# Allegro board MK60_MODULE_V10A.brd
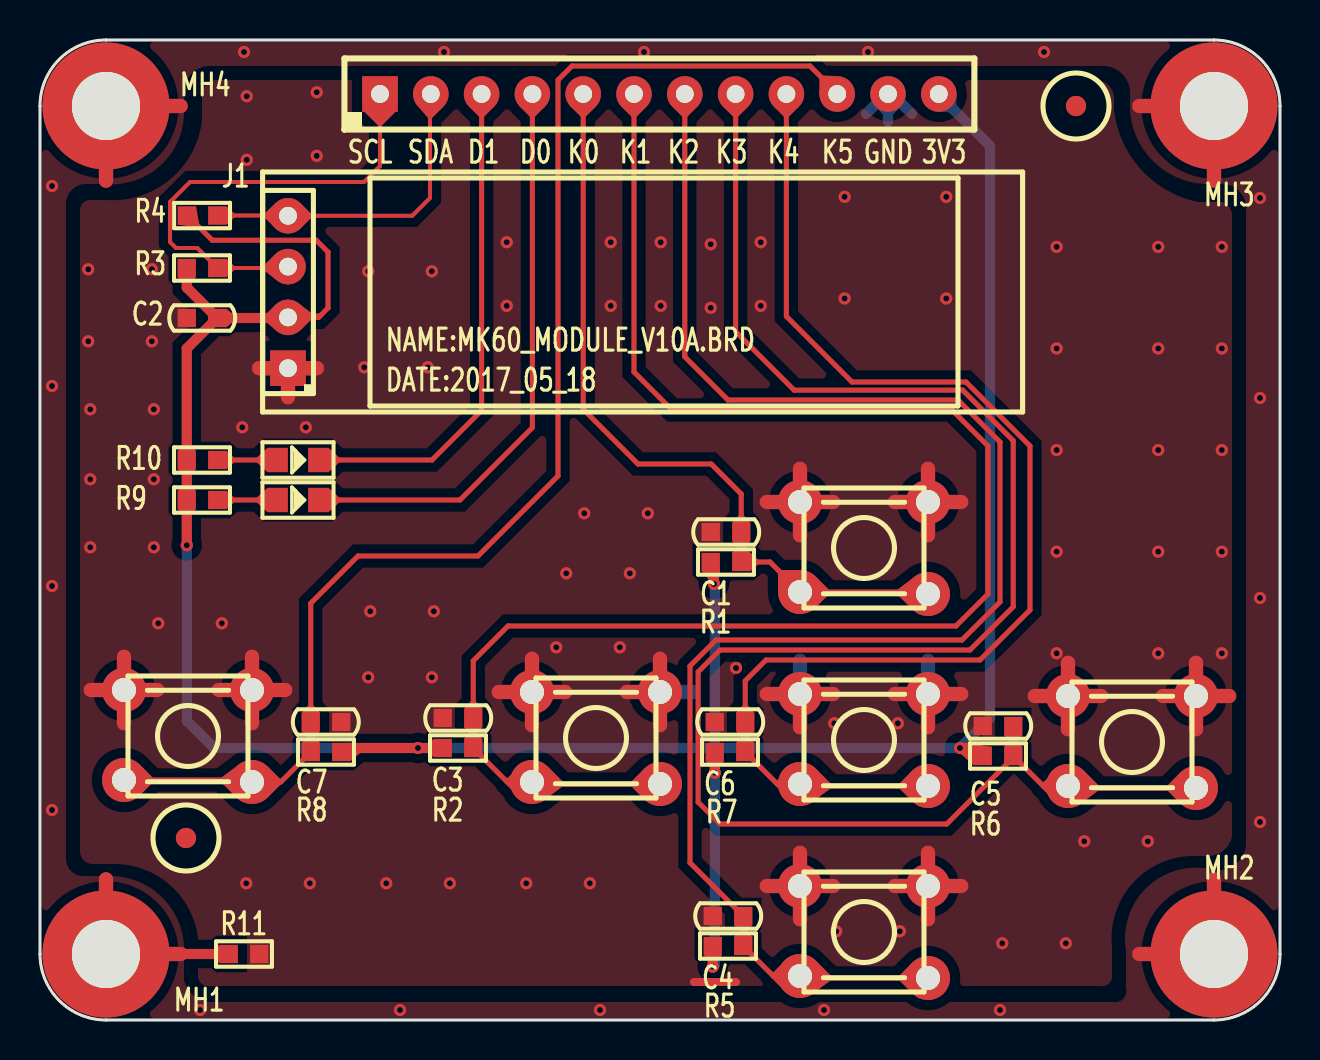
[diagram p0: board, top side]
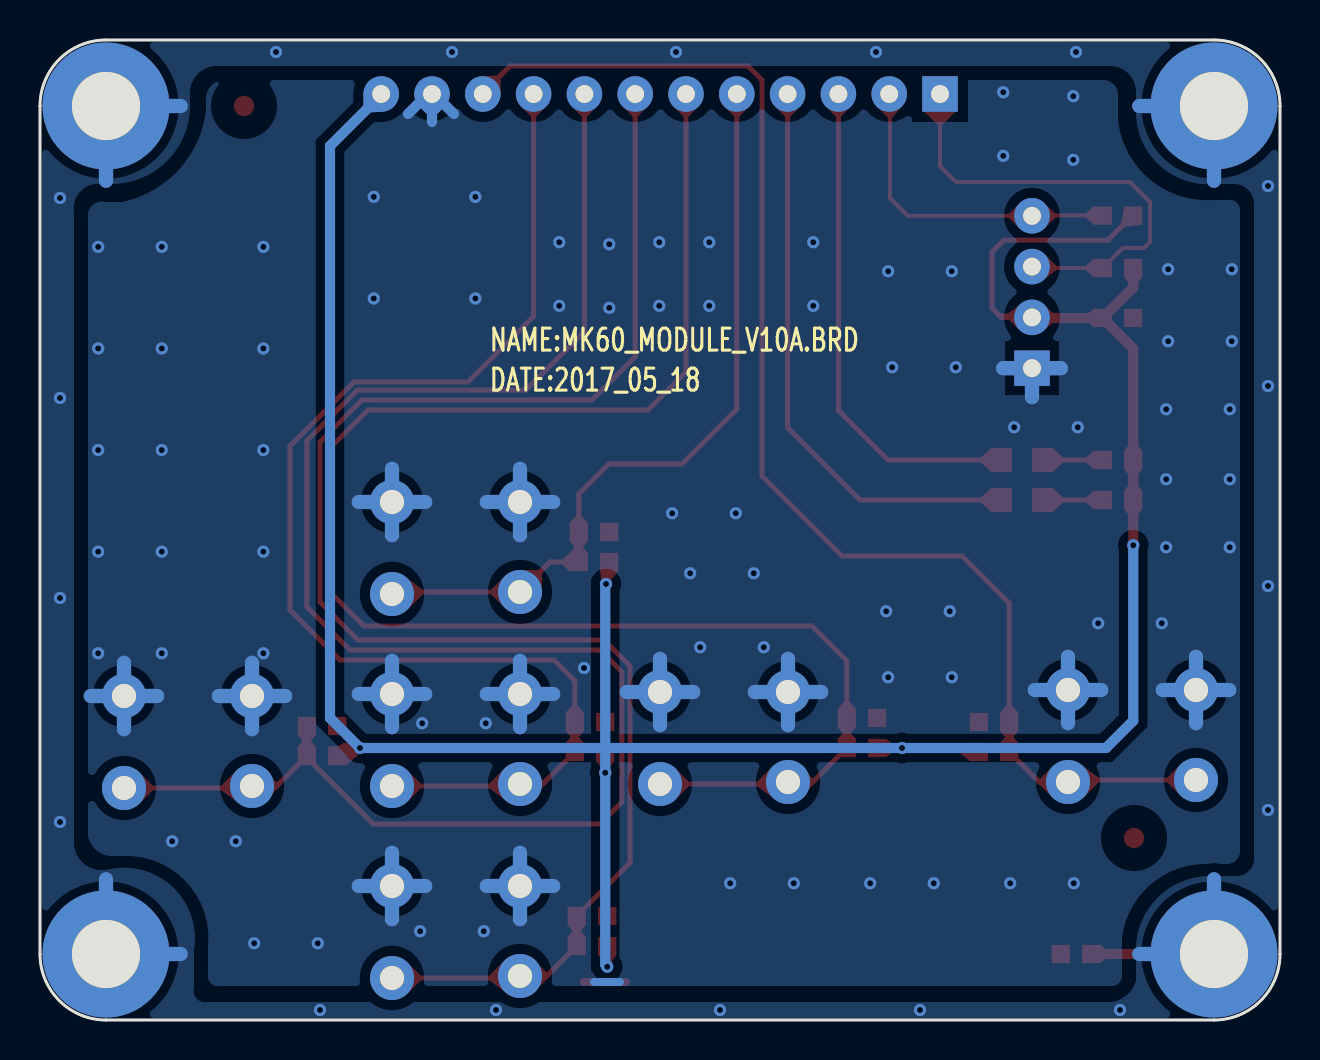
[diagram p1: board, bottom side, seen from below]

Outline 62 x 49 mm; copper layers: TOP, BOTTOM. Coordinates in mm from the lower left corner of the outline.
Outline path: 0,45.7 0,3.3 arc(0.97,0.97) 3.3,0 58.7,0 arc(61.03,0.97) 62,3.3 62,45.7 arc(61.03,48.03) 58.7,49 3.3,49 arc(0.97,48.03) 0,45.7

## Placement (name value [footprint] x y rotation side)
C1  0.1uF_50V  [CC0603]  34.3 24.4 0 top
C2  0.1uF_50V  [CC0603]  8.1 35.1 0 top
C3  0.1uF_50V  [CC0603]  20.9 15.1 0 top
C4  0.1uF_50V  [CC0603]  34.4 5.2 0 top
C5  0.1uF_50V  [CC0603]  47.9 14.7 0 top
C6  0.1uF_50V  [CC0603]  34.5 14.9 0 top
C7  0.1uF_50V  [CC0603]  14.3 14.9 180 top
D1  LED_GREEN  [LED0805]  12.9 26 0 top
D2  LED_GREEN  [LED0805]  12.9 28 0 top
J1  -  [OLED-0R91]  12.4 36.4 0 top
J2  -  [HEADER12X1_2R54]  17 46.3 0 top
MH1  HOLD-M3  [HOLD250D134]  3.3 3.3 0 top
MH2  HOLD-M3  [HOLD250D134]  58.7 3.3 0 top
MH3  HOLD-M3  [HOLD250D134]  58.7 45.7 0 top
MH4  HOLD-M3  [HOLD250D134]  3.3 45.7 0 top
MP1  MarkPoint  [MARKPOINT_R3]  7.3 9.1 0 top
MP2  MarkPoint  [MARKPOINT_R3]  51.8 45.7 0 top
NOREF  -  []  7.7 0 90 top
NOREF#2  -  []  0 8.3 0 top
NOREF#3  -  []  6.2 0 90 top
NOREF#4  -  []  0 4 0 top
NOREF#5  -  []  5.6 0 90 top
NOREF#6  -  []  0 3.7 0 top
R1  10k  [RC0603]  34.3 22.9 0 top
R2  10k  [RC0603]  20.9 13.6 0 top
R3  4.7k  [RC0603]  8.1 37.6 0 top
R4  4.7Kk  [RC0603]  8.1 40.22 0 top
R5  10k  [RC0603]  34.4 3.7 0 top
R6  10k  [RC0603]  47.9 13.2 0 top
R7  10k  [RC0603]  34.5 13.4 0 top
R8  10k  [RC0603]  14.3 13.4 180 top
R9  1K  [RC0603]  8.1 26 180 top
R10  1K  [RC0603]  8.1 28 180 top
R11  0R/NI  [RC0603]  10.2 3.3 0 top
SW1  KEY  [SW-6X6X6]  41.2 23.6 270 top
SW2  KEY  [SW-6X6X6]  27.8 14.1 270 top
SW3  KEY  [SW-6X6X6]  41.2 4.4 270 top
SW4  KEY  [SW-6X6X6]  54.6 13.9 270 top
SW5  KEY  [SW-6X6X6]  41.2 14 270 top
SW6  KEY  [SW-6X6X6]  7.4 14.2 270 top

## Library data of the parts
C1-C7 = CAP NP_2
D1 D2 = LED_4
J1 = OLED-0R91_1
J2 = CONN RCPT 12
MH1-MH4 = Hold_1
MP1 MP2 = MarkPoint
R1-R11 = R_Generic
SW1-SW6 = SWITCH-SPST-4P

## Footprints (pads in the part's own frame, mm; a bottom-side part is the same pattern mirrored in y, then rotated)
CC0603
  rect 0.914x0.914 smd: 1(-0.762,0) 2(0.762,0)
HEADER12X1_2R54
  rect 1.778x1.778 hole 0.889: 1(0,0)
  round 1.778 hole 0.889: 2(2.54,0) 3(5.08,0) 4(7.62,0) 5(10.16,0) 6(12.7,0) 7(15.24,0) 8(17.78,0) 9(20.32,0) 10(22.86,0) 11(25.4,0) 12(27.94,0)
HOLD250D134
  round 6.35 hole 3.404: 1(0,0)
LED0805
  rect 1.016x1.219 smd: 1(-1.016,0) 2(1.016,0)
MARKPOINT_R3
  round 1.016 smd: 1(0,0)
OLED-0R91
  rect 1.778x1.778 hole 0.889: 1(0,-3.81)
  round 1.778 hole 0.889: 2(0,-1.27) 3(0,1.27) 4(0,3.81)
RC0603
  rect 0.914x0.914 smd: 1(-0.762,0) 2(0.762,0)
SW-6X6X6
  round 2.2 hole 1.2: 1(-2.3,3.2) 2(-2.3,-3.2) 3(2.3,3.2) 4(2.2,-3.2)

## Nets
GND: C1.1 C2.1 C3.1 C4.1 C5.1 C6.1 C7.1 J1.1(GND) J2.11 R11.2 SW1.1 SW1.2 SW2.1 SW2.2 SW3.1 SW3.2 SW4.1 SW4.2 SW5.1 SW5.2 SW6.1 SW6.2
VCC_3.3V: C2.2 J1.2(VCC) J2.12 R1.1 R2.1 R3.1 R4.1 R5.1 R6.1 R7.1 R8.1 R9.2 R10.2
KEY0: C1.2 J2.5 R1.2 SW1.3 SW1.4
KEY1: C3.2 J2.6 R2.2 SW2.3 SW2.4
KEY2: C4.2 J2.7 R5.2 SW3.3 SW3.4
KEY3: C5.2 J2.8 R6.2 SW4.3 SW4.4
KEY4: C6.2 J2.9 R7.2 SW5.3 SW5.4
KEY5: C7.2 J2.10 R8.2 SW6.3 SW6.4
LED0: D1.2(CATHODE) J2.4
LED1: D2.2(CATHODE) J2.3
OLED_SCL: J1.3(SCL) J2.1 R3.2
OLED_SDA: J1.4(SDA) J2.2 R4.2
N16849719: D1.1(ANODE) R9.1
N16849790: D2.1(ANODE) R10.1
N16850249: MH1.1 MH2.1 MH3.1 MH4.1 R11.1

Pads without a net: MP1 1; MP2 1

## Via types
v1: diameter 0.61, hole 0.305, TOP to BOTTOM, 100 vias

## Routing (per net, layer and track width the routed paths; a pad name or vN(x,y) marks a point on that pad's centre or on a via; arc(x,y) is an arc through that point)
GND: length 170.9
  TOP w0.4: 34.8,1.9 32.7,1.9
  TOP w0.711: SW1.2 38,27.56 ; SW1.2 38,24.24 ; SW1.2 39.66,25.9 ; SW1.2 36.34,25.9 ; 44.4,24.24 SW1.1 ; SW1.1 44.4,27.56 ; SW1.1 46.06,25.9 ; SW1.1 42.74,25.9 ; SW4.1 59.46,16.2 ; SW4.1 57.8,17.86 ; SW4.1 56.14,16.2 ; SW4.1 57.8,14.54 ; SW2.2 24.6,18.06 ; SW2.2 24.6,14.74 ; SW2.2 22.94,16.4 ; SW2.2 26.26,16.4 ; 44.4,14.64 SW5.1 ; SW5.1 42.74,16.3 ; SW5.1 46.06,16.3 ; SW3.1 44.4,8.36 ; SW3.1 44.4,5.04 ; SW3.1 46.06,6.7 ; SW3.1 42.74,6.7 ; SW5.2 39.66,16.3 ; SW5.2 38,14.64 ; SW5.2 36.34,16.3 ; SW6.2 5.86,16.5 ; SW6.2 4.2,18.16 ; SW6.2 2.54,16.5 ; SW6.2 4.2,14.84 ; 51.4,14.54 SW4.2 ; SW4.2 53.06,16.2 ; SW4.2 49.74,16.2 ; SW4.2 51.4,17.86 ; 10.95,32.59 J1.1 ; J1.1 13.85,32.59 ; J1.1 12.4,31.14 ; SW3.2 39.66,6.7 ; SW3.2 38,8.36 ; SW3.2 36.34,6.7 ; SW3.2 38,5.04 ; SW6.1 10.6,18.16 ; SW6.1 8.94,16.5 ; SW6.1 12.26,16.5 ; SW6.1 10.6,14.84 ; 29.34,16.4 SW2.1 ; SW2.1 31,18.06 ; SW2.1 31,14.74
  BOTTOM w0.4: 34.3,1.9 33,1.9
  BOTTOM w0.508: 41.3,45.3 42.3,46.3 J2.11 ; J2.11 42.4,44.9 ; J2.11 42.6,46.3 43.6,45.3
  BOTTOM w0.711: SW3.2 38,8.36 ; SW3.2 39.66,6.7 ; SW3.2 38,5.04 ; SW3.2 36.34,6.7 ; 8.94,16.5 SW6.1 ; SW6.1 10.6,18.16 ; SW6.1 10.6,14.84 ; SW6.1 12.26,16.5 ; SW3.1 46.06,6.7 ; SW3.1 44.4,5.04 ; SW3.1 42.74,6.7 ; SW3.1 44.4,8.36 ; 29.34,16.4 SW2.1 ; SW2.1 32.66,16.4 ; SW2.1 31,18.06 ; SW2.1 31,14.74 ; SW1.1 46.06,25.9 ; SW1.1 44.4,24.24 ; SW1.1 42.74,25.9 ; SW1.1 44.4,27.56 ; 12.4,31.14 J1.1 ; J1.1 10.95,32.59 ; J1.1 13.85,32.59 ; 57.8,14.54 SW4.1 ; SW4.1 57.8,17.86 ; SW4.1 56.14,16.2 ; SW4.1 59.46,16.2 ; SW1.2 38,27.56 ; SW1.2 39.66,25.9 ; SW1.2 36.34,25.9 ; SW1.2 38,24.24 ; 51.4,14.54 SW4.2 ; SW4.2 49.74,16.2 ; SW4.2 53.06,16.2 ; SW4.2 51.4,17.86 ; SW5.2 38,17.96 ; SW5.2 36.34,16.3 ; SW5.2 38,14.64 ; SW5.2 39.66,16.3 ; 2.54,16.5 SW6.2 ; SW6.2 4.2,18.16 ; SW6.2 5.86,16.5 ; SW6.2 4.2,14.84 ; SW5.1 46.06,16.3 ; SW5.1 44.4,14.64 ; SW5.1 44.4,17.96 ; SW5.1 42.74,16.3 ; 22.94,16.4 SW2.2 ; SW2.2 24.6,14.74 ; SW2.2 24.6,18.06 ; SW2.2 26.26,16.4
  vias: v1(2.41,37.54) v1(2.41,33.94) v1(2.51,30.54) v1(2.51,27.04) v1(2.51,23.64) v1(5.59,37.54) v1(5.59,33.94) v1(5.69,30.54) v1(5.69,27.04) v1(5.69,23.64) v1(5.91,19.84) v1(9.09,19.84) v1(10.11,29.64) v1(10.34,46.19) v1(10.34,43.01) v1(10.31,6.84) v1(13.29,29.64) v1(13.49,6.84) v1(13.84,46.39) v1(13.84,43.21) v1(16.21,32.64) v1(16.41,37.44) v1(16.41,17.14) v1(16.51,20.44) v1(17.31,6.84) v1(19.39,32.64) v1(19.59,37.44) v1(19.59,17.14) v1(19.69,20.44) v1(20.49,6.84) v1(23.34,38.89) v1(23.34,35.71) v1(24.31,6.84) v1(25.81,18.64) v1(26.31,22.34) v1(27.21,25.34) v1(27.49,6.84) v1(28.54,38.89) v1(28.54,35.71) v1(28.99,18.64) v1(29.49,22.34) v1(30.39,25.34) v1(31.04,38.89) v1(31.04,35.71) v1(33.54,38.79) v1(33.54,35.61) v1(34.8,17.6) v1(36.04,38.89) v1(36.04,35.71) v1(39.71,14.84) v1(39.81,4.44) v1(40.23,41.16) v1(40.23,36.08) v1(42.89,14.84) v1(42.99,4.44) v1(45.31,41.16) v1(45.31,36.08) v1(48.11,3.84) v1(50.83,38.66) v1(50.83,33.58) v1(50.83,28.5) v1(50.83,23.42) v1(50.83,18.34) v1(51.29,3.84) v1(52.21,8.94) v1(55.39,8.94) v1(55.91,38.66) v1(55.91,33.58) v1(55.91,28.5) v1(55.91,23.42) v1(55.91,18.34) v1(59.09,38.66) v1(59.09,33.58) v1(59.09,28.5) v1(59.09,23.42) v1(59.09,18.34)
VCC_3.3V: length 144.5
  TOP w0.254: 14,35.2 13.93,35.13 J1.2 12.47,35.2 14,35.2 ; 14,35.2 14.4,35.6 14.4,38.4 13.81,38.99 8.61,38.99 7.38,40.22 R4.1
  TOP w0.508: C2.2 12.37,35.1 J1.2 ; C2.2 7.34,36.62 R3.1 ; C2.2 7.34,33.58 R10.2 R9.2 v1(7.34,23.74) ; R2.1 v1(18.9,13.6) 15.26,13.6 R8.1 ; v1(46,13.6) 46.74,13.6 R6.1 ; R1.1 33.7,22.74 v1(33.7,21.8) ; R7.1 v1(33.74,12.36) ; R5.1 v1(33.64,2.66)
  BOTTOM w0.508: 33.74,13.7 v1(33.74,12.36) 33.74,2.76 v1(33.64,2.66) ; 33.74,13.7 33.84,13.6 v1(46,13.6) 47.5,15.1 47.5,43.7 44.94,46.26 J2.12 ; 33.74,13.7 33.64,13.6 v1(18.9,13.6) 8.7,13.6 7.34,14.96 v1(7.34,23.74) ; 33.74,13.7 33.74,21.76 v1(33.7,21.8)
KEY0: length 38.8
  TOP w0.254: SW1.3 44.3,21.4 SW1.4 36.5,22.9 R1.2 C1.2 35.06,26.3 33.56,27.8 29.9,27.8 27.16,30.54 J2.5
KEY1: length 82.1
  TOP w0.254: SW2.3 24.7,11.8 SW2.4 23.36,11.9 R2.2 C3.2 21.66,17.96 23.4,19.7 45.8,19.7 47.4,21.3 47.4,28.7 45.6,30.5 31.6,30.5 29.7,32.4 J2.6
KEY2: length 80.5
  TOP w0.254: SW3.3 38.1,2.1 SW3.4 36.66,2.2 R5.2 C4.2 32.5,7.86 32.5,17.7 33.8,19 46.1,19 48,20.9 48,28.9 45.9,31 34.4,31 32.24,33.16 J2.7
KEY3: length 88.9
  TOP w0.254: 48.7,13.16 R6.2 C5.2 ; 48.7,13.16 45.34,9.8 34,9.8 32.91,10.89 32.91,17.41 34,18.5 46.5,18.5 48.66,20.66 48.66,28.96 46.13,31.49 37.71,31.49 34.78,34.42 J2.8 ; 48.7,13.16 50.16,11.7 SW4.4 51.5,11.6 SW4.3
KEY4: length 63.3
  TOP w0.254: J2.9 37.32,35.18 40.6,31.9 46.3,31.9 49.5,28.7 49.5,20.5 47,18 36.3,18 35.26,16.96 C6.2 R7.2 36.86,11.8 SW5.4 38.1,11.7 SW5.3
KEY5: length 67.1
  TOP w0.254: J2.10 39.86,46.34 38.5,47.7 26.6,47.7 25.9,47 25.9,27.2 21.9,23.2 15.9,23.2 13.54,20.84 C7.2 R8.2 12.04,11.9 SW6.3 10.5,12 SW6.4
LED0: length 28.9
  TOP w0.254: J2.4 24.62,29.62 21,26 D1.2
LED1: length 25
  TOP w0.254: D2.2 19.6,28 22.08,30.48 J2.3
OLED_SCL: length 23.3
  TOP w0.203: J1.3 12.33,37.6 R3.2 7.86,38.6 6.8,38.6 6.5,38.9 6.5,40.9 7.5,41.9 16.2,41.9 17,42.7 J2.1
OLED_SDA: length 16.2
  TOP w0.203: R4.2 12.39,40.22 J1.4 18.61,40.21 19.5,41.1 19.5,46.26 J2.2
N16849719: length 3
  TOP w0.254: R9.1 D1.1
N16849790: length 3
  TOP w0.254: R10.1 D2.1
N16850249: length 62.1
  TOP w0.508: R11.1 7.03,3.3
  TOP w0.711: 7.03,45.7 MH4.1 3.3,41.97 ; 58.7,7.03 MH2.1 54.97,3.3 ; 54.97,45.7 MH3.1 58.7,41.97 ; 7.03,3.3 MH1.1 3.3,7.03
  BOTTOM w0.711: 7.03,45.7 MH4.1 3.3,41.97 ; 7.03,3.3 MH1.1 3.3,7.03 ; 54.97,3.3 MH2.1 58.7,7.03 ; 58.7,41.97 MH3.1 54.97,45.7
  vias: v1(0.6,41.7) v1(0.6,31.7) v1(0.6,21.7) v1(0.6,10.5) v1(8,0.5) v1(10.2,48.4) v1(18,0.5) v1(20.2,48.4) v1(28,0.5) v1(30.2,48.4) v1(39.2,0.5) v1(41.4,48.4) v1(48,0.5) v1(50.2,48.4) v1(61,41.1) v1(61,31.1) v1(61,21.1) v1(61,9.9)

## Copper pours and planes (outline as drawn; the poured copper is in the pictures)
GND on TOP: 2.6,41 2.18,40.89 2,40.5 2,8.5 2.19,7.99 2.7,7.8 3.6,7.8 6.46,6.78 7.9,4.1 7.9,2.2 8.09,1.81 8.5,1.7 53,1.7 53.46,1.84 53.6,2.3 53.6,3.7 54.62,6.82 57.6,8.2 58.3,8.2 59.14,8.45 59.6,9.2 59.6,40.1 59.37,40.75 58.7,40.9 57.9,40.9 55.06,42.52 53.7,45.5 53.7,45.9 53.43,46.73 52.6,47 8.8,47 8.28,46.74 8.1,46.2 8.1,45 6.51,42.03 3.3,41 ; 9 cut-outs
GND on BOTTOM: 2.6,41 2.18,40.89 2,40.5 2,8.5 2.19,7.99 2.7,7.8 3.6,7.8 6.46,6.78 7.9,4.1 7.9,2.2 8.09,1.81 8.5,1.7 53,1.7 53.46,1.84 53.6,2.3 53.6,3.7 54.62,6.82 57.6,8.2 58.3,8.2 59.14,8.45 59.6,9.2 59.6,40.1 59.37,40.75 58.7,40.9 57.9,40.9 55.06,42.52 53.7,45.5 53.7,45.9 53.43,46.73 52.6,47 8.8,47 8.28,46.74 8.1,46.2 8.1,45 6.51,42.03 3.3,41
KEY0 on TOP (solid shape): 38.02,21.38 36.9,21.4 36.9,22.37 36.94,22.46 37.03,22.5 38,22.5
KEY0 on TOP (solid shape): 39.47,21.49 39.5,21.4 39.47,21.31 38.78,20.62 37.97,21.4 38.78,22.18
KEY0 on TOP (solid shape): 44.43,21.3 43.62,20.52 42.83,21.31 42.8,21.41 42.85,21.5 43.64,22.09
KEY1 on TOP (solid shape): 24.63,11.9 23.82,11.26 23.27,11.81 23.24,11.9 23.27,11.99 23.82,12.54
KEY1 on TOP (solid shape): 31.03,11.8 30.22,11.02 29.53,11.71 29.5,11.8 29.53,11.89 30.22,12.58
KEY1 on TOP (solid shape): 26.17,11.89 26.2,11.79 26.15,11.7 25.36,11.11 24.57,11.9 25.38,12.68
KEY2 on TOP (solid shape): 38.03,2.2 37.22,1.46 36.57,2.11 36.54,2.2 36.57,2.29 37.22,2.94
KEY2 on TOP (solid shape): 44.43,2.1 43.62,1.32 42.93,2.01 42.9,2.1 42.93,2.19 43.62,2.88
KEY2 on TOP (solid shape): 39.57,2.19 39.6,2.09 39.55,2 38.76,1.41 37.97,2.2 38.78,2.98
KEY3 on TOP (solid shape): 51.43,11.7 50.62,11.06 50.07,11.61 50.04,11.7 50.07,11.79 50.62,12.34
KEY3 on TOP (solid shape): 57.83,11.6 57.02,10.82 56.33,11.51 56.3,11.6 56.33,11.69 57.02,12.38
KEY3 on TOP (solid shape): 52.97,11.69 53,11.59 52.95,11.5 52.16,10.91 51.37,11.7 52.18,12.48
KEY4 on TOP (solid shape): 44.43,11.7 43.62,10.92 42.93,11.61 42.9,11.7 42.93,11.79 43.62,12.48
KEY4 on TOP (solid shape): 39.57,11.79 39.6,11.69 39.55,11.6 38.76,11.01 37.97,11.8 38.78,12.58
KEY5 on TOP (solid shape): 5.67,12.09 5.7,12 5.67,11.91 4.98,11.22 4.17,12 4.98,12.78
KEY5 on TOP (solid shape): 12.07,11.99 12.1,11.9 12.07,11.81 11.38,11.12 10.57,11.9 11.38,12.68
KEY5 on TOP (solid shape): 10.63,11.9 9.82,11.12 9.03,11.91 9,12.01 9.05,12.1 9.84,12.69
OLED_SCL on TOP (solid shape): 17.78,45.41 17.06,44.7 17,44.67 16.94,44.7 16.22,45.41 17,46.33
N16850249 on TOP, BOTTOM: 3.3,0.1 1.05,1.05 0.1,3.3 0.1,45.7 1.05,47.95 3.3,48.9 58.7,48.9 60.95,47.95 61.9,45.7 61.9,3.3 60.95,1.05 58.7,0.1 ; 1 cut-out
GND on BOTTOM (solid shape): 43.03,45.67 42.58,45.22 42.4,45.15 42.22,45.22 41.77,45.67 42.4,46.36
VCC_3.3V on TOP (solid shape): 7.96,39.77 7.92,39.68 7.83,39.64 6.88,39.77 7.32,40.25 7.8,40.68
VCC_3.3V on TOP (solid shape): 13.57,35.22 13.6,35.13 13.57,35.04 13.03,34.5 12.37,35.13 13.03,35.76
VCC_3.3V on TOP (solid shape): 13.63,35.3 13.67,35.21 13.64,35.11 13.03,34.5 12.37,35.13 13.02,35.77
VCC_3.3V on TOP (solid shape): 34,22.44 33.9,21.92 33.75,21.83 33.57,21.86 33.08,22.44 33.53,22.96
VCC_3.3V on TOP (solid shape): 12.46,35.13 11.78,34.49 11.3,34.91 11.22,35.09 11.29,35.28 11.77,35.76
VCC_3.3V on TOP (solid shape): 16.06,13.81 16.17,13.66 16.14,13.47 15.52,12.94 15,13.39 15.52,13.86
VCC_3.3V on TOP (solid shape): 47.6,13.66 47.2,13.18 46.68,12.74 45.87,13.45 45.85,13.71 46.07,13.85
KEY0 on TOP (solid shape): 27.79,45.67 27.25,45.13 27.16,45.1 27.07,45.13 26.53,45.67 27.16,46.33
KEY1 on TOP (solid shape): 30.33,45.67 29.79,45.13 29.7,45.1 29.61,45.13 29.07,45.67 29.7,46.33
KEY2 on TOP (solid shape): 32.87,45.67 32.33,45.13 32.24,45.1 32.15,45.13 31.61,45.67 32.24,46.33
KEY3 on TOP (solid shape): 35.41,45.67 34.87,45.13 34.78,45.1 34.69,45.13 34.15,45.67 34.78,46.33
KEY4 on TOP (solid shape): 37.95,45.67 37.41,45.13 37.32,45.1 37.23,45.13 36.69,45.67 37.32,46.33
KEY4 on TOP (solid shape): 38.03,11.8 37.22,11.26 36.77,11.71 36.74,11.8 36.77,11.89 37.22,12.34
LED0 on TOP (solid shape): 15.01,26.08 15.03,26 15.01,25.92 14.42,25.39 13.88,26 14.42,26.61
LED0 on TOP (solid shape): 25.25,45.67 24.71,45.13 24.62,45.1 24.53,45.13 23.99,45.67 24.62,46.33
LED1 on TOP (solid shape): 15.01,28.08 15.03,28 15.01,27.92 14.42,27.39 13.88,28 14.42,28.61
LED1 on TOP (solid shape): 22.71,45.67 22.17,45.13 22.08,45.1 21.99,45.13 21.45,45.67 22.08,46.33
OLED_SCL on TOP (solid shape): 12.43,37.67 11.78,37.03 11.15,37.52 11.12,37.59 11.14,37.67 11.77,38.3
OLED_SDA on TOP (solid shape): 12.43,40.21 11.77,39.58 11.2,40.15 11.17,40.23 11.2,40.3 11.77,40.84
OLED_SDA on TOP (solid shape): 13.59,40.28 13.62,40.21 13.59,40.14 13.03,39.58 12.37,40.21 13.03,40.84
OLED_SDA on TOP (solid shape): 20.17,45.67 19.57,45.07 19.5,45.04 19.42,45.08 18.91,45.68 19.54,46.33
N16849719 on TOP (solid shape): 11.92,26 11.38,25.39 10.79,25.92 10.77,26 10.79,26.08 11.38,26.61
N16849790 on TOP (solid shape): 11.92,28 11.38,27.39 10.79,27.92 10.77,28 10.79,28.08 11.38,28.61

Small or netless copper shapes (teardrops, artwork), in the pictures only: 32 on TOP, 3 on BOTTOM

## Text on the board
Ref Des/Silkscreen Bottom: NAME:MK60_MODULE_V10A.BRD | DATE:2017_05_18
Ref Des/Silkscreen Top: SCL | NAME:MK60_MODULE_V10A.BRD | DATE:2017_05_18 | SDA | D1 | D0 | K0 | K1 | K2 | K3 | K4 | K5 | GND | 3V3
DIMENSION: FIGURE | SIZE | 0.3048 | 0.889 | 1.2 | 3.4036 | DRILL CHART: TOP to BOTTOM | ALL UNITS ARE IN MILLIMETERS | PLATED | QTY | 100 | 2 | 14 | 24 | 4
